# Altium PCB stlink072.PcbDoc
Units mm, origin at the board's own origin, x right, y up, seen from the top; angles counter-clockwise.
Board outline 48 x 18 mm, 2 copper layers (Top Layer, Bottom Layer); 29 components, 29 nets, 121 pads, 35 vias.
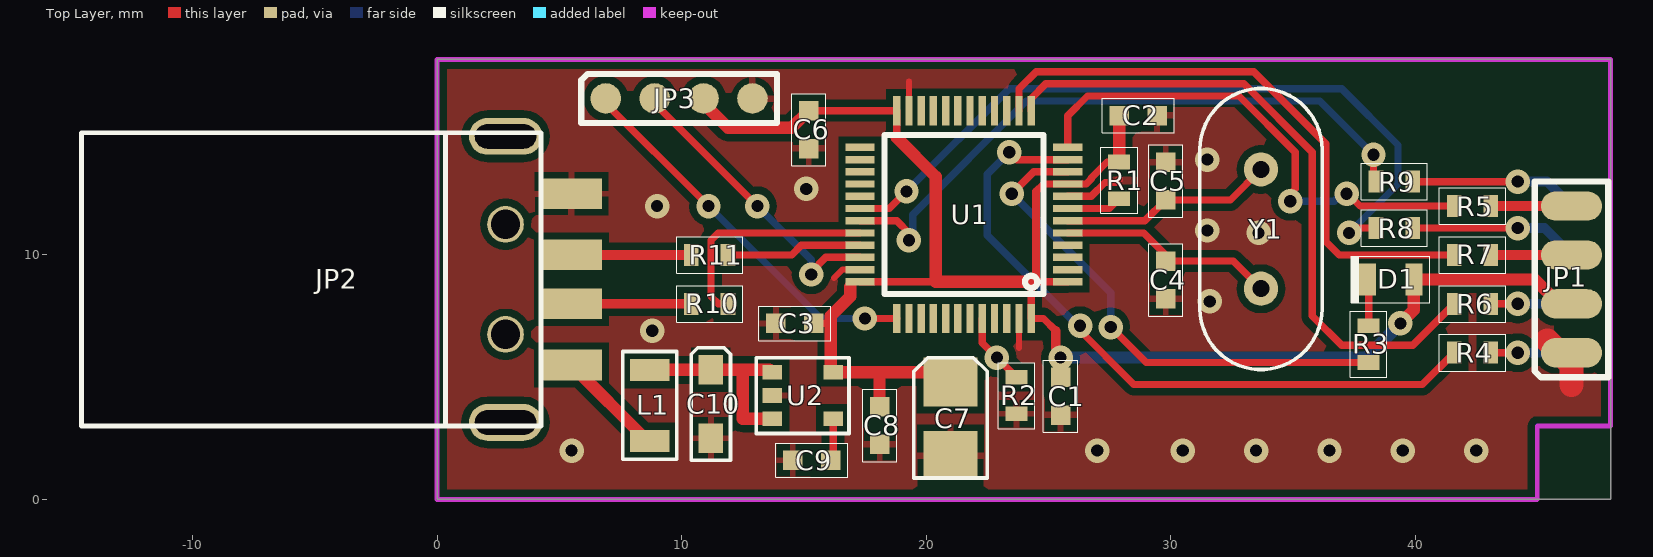
[diagram p0: Top Layer view]
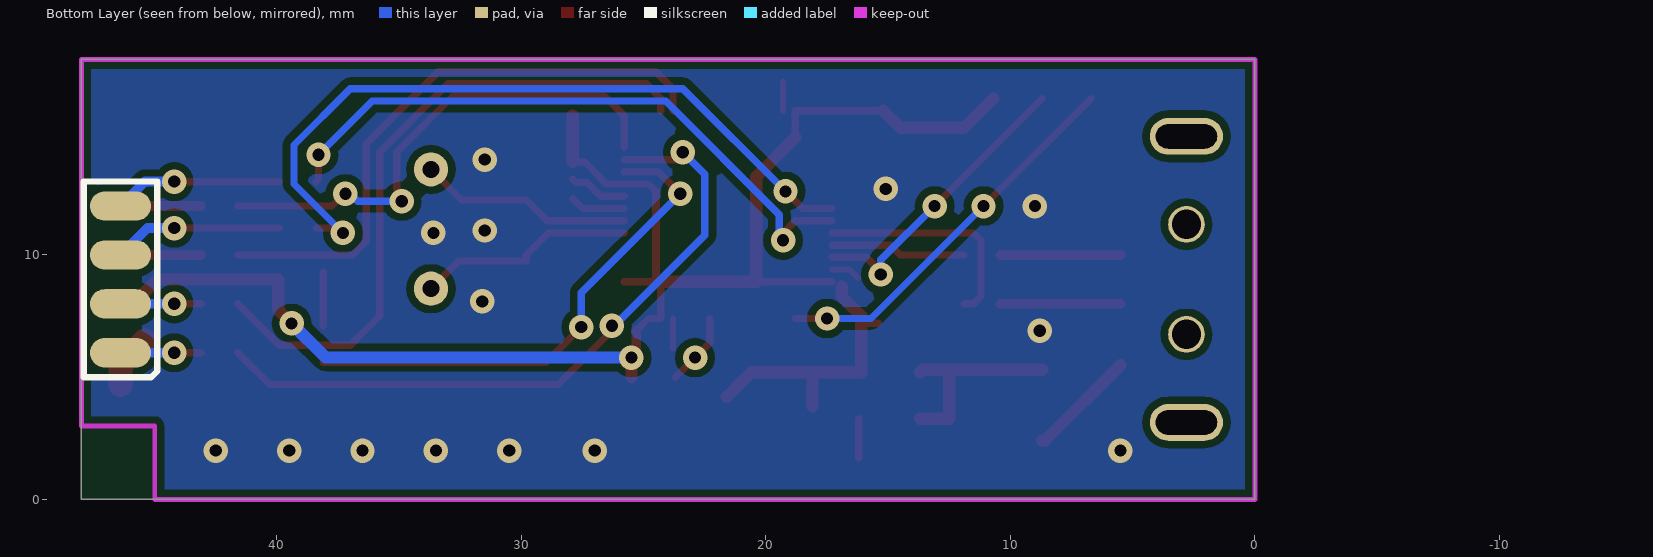
[diagram p1: Bottom Layer view, seen from below]

## Layer stack, top to bottom
Top Solder: solder mask 0.0102, Solder Resist, Dk 3.5
Top Layer: signal copper 0.0356
Dielectric 1: dielectric 0.32, FR-4, Dk 4.8
Bottom Layer: signal copper 0.0356
Bottom Solder: solder mask 0.0102, Solder Resist, Dk 3.5

## Board outline
0,0 48,0 48,18 0,18

## Design rules (kind name [scope] priority, off if disabled: settings)
Clearance Clearance_2 [InNamedPolygon('GND_B') Or  InNamedPolygon('GND_T')] p1: gap=0.3 ignorepadtopadclearanceinfootprint=FALSE except(0: Arc-Hole Track-Hole SMDPad-Hole THPad-Hole Via-Hole Fill-Hole Poly-Hole Region-Hole Text-Hole)
Clearance Clearance_1 [InNamedPolygon('GND_T') vs InComponent('JP1')] p2: gap=0.5 ignorepadtopadclearanceinfootprint=FALSE except(0: Arc-Hole Track-Hole SMDPad-Hole THPad-Hole Via-Hole Fill-Hole Poly-Hole Region-Hole Text-Hole)
Clearance [All] p3: gap=0.2 ignorepadtopadclearanceinfootprint=FALSE except(0: Arc-Hole Track-Hole SMDPad-Hole THPad-Hole Via-Hole Fill-Hole Poly-Hole Region-Hole Text-Hole)
ComponentClearance [InComponent('JP3') vs InComponent('JP1')] p1: gap=-2 collisioncheckmode=3 verticalgap=-2 showdistances=FALSE
HoleSize [All] p1: absolutevalues=TRUE maxlimit=3 minlimit=0.025 maxpercent=80.000 minpercent=20.000
MinimumSolderMaskSliver [All] p1: minsoldermaskwidth=0
PolygonConnect PolygonConnect_1 [IsVia vs IsNamedPolygon('GND_T') Or  IsNamedPolygon('GND_B')] p1: connectstyle=Direct reliefconductorwidth=0.254 reliefentries=4 polygonreliefangle="90 Angle" airgapwidth=0.254
PolygonConnect [All] p2: connectstyle=Relief reliefconductorwidth=0.254 reliefentries=4 polygonreliefangle="90 Angle" airgapwidth=0.254
RoutingVias [All] p1: holewidth=0.5 width=1 viastyle="Through Hole" minholewidth=0.4 minwidth=0.9 maxholewidth=2.5 maxwidth=3
SilkToSilkClearance [All] p1: silktosilkclearance=0
SilkToSolderMaskClearance [IsPad] p1: minsilkscreentomaskgap=0 clearancetoexposedcopper=TRUE
SolderMaskExpansion SolderMaskExpansion_1 [All] p1: expansion=0.1
SolderMaskExpansion [IsVia] p2: expansion=-0.15
Width [All] p1: maxlimit=2 minlimit=0.2 preferedwidth=0.2
25 further rules are at their usual default settings.

## Components (designator, comment, footprint, x,y, rotation, side; value= is the part's Value field where it differs from the comment)
C1 "100nF" C-0603 25.5,5 r270 top
C2 "100nF" C-0603 27.9,15.7 r0 top
C3 "100nF" C-0603 15.4,7.2 r180 top
C4 "22pF" C-0603 29.8,8.2 r90 top
C5 "22pF" C-0603 29.8,13.8 r270 top
C6 "100nF" C-0603 15.2,15.9 r270 top
C7 "33uF 6V" TANTAL-B 21,1.8 r90 top
C8 "100nF" C-0603 18.1,3.8 r270 top
C9 "nc" C-0603 16.1,1.6 r180 top
C10 "10uF 6V" TANTAL-A 11.2,2.5 r90 top
D1 "LED" LED-0805 39,9 r0 top
JP1 "Header 4X2" HDR2x4smd 46.4,9 r90 top
JP2 "USB_conn" USB_A_M_SMD 5.5,9 r90 top locked
JP3 "Header 4" HDR1x4_SS 9.9,16.4 r0 top
L1 "SUPRESOR" R-1206 8.7,5.3 r270 top
R1 "10k" R-0603 27.9,13.8 r270 top
R2 "10k" R-0603 23.7,3.5 r90 top
R3 "1k" R-0603 38.1,5.6 r90 top
R4 "100R" R-0603 41.6,6 r0 top
R5 "100R" R-0603 41.6,12 r0 top
R6 "100R" R-0603 41.6,8 r0 top
R7 "100R" R-0603 41.6,10 r0 top
R8 "100R" R-0603 38.4,11.1 r0 top
R9 "100R" R-0603 38.4,13 r0 top
R10 "0" R-0603 11.9,8 r180 top
R11 "0" R-0603 11.9,10 r180 top
U1 "STM32F072C8T6" LQFP48 25.8,14.4 r180 top
U2 "LP2981-3.3" SOT-23-5 13.7,5.2 r90 top
Y1 "8 MHz" HC-49/U(T) 33.7,13.5 r270 top

## Footprints (in the part's own frame and the unit in brackets; to place one, negate y for a bottom-side part, rotate by r counter-clockwise, add the part's x,y. Pads: shape width x height; smd on the part's side, far side on the other; paste and mask are expansions set on the pad)
C-0603 [mm]
  rect 0.8x0.8 smd: 1(0,0) 2(1.55,0)
  silkscreen extent -0.7,-0.7 2.25,0.7
HC-49/U(T) [mm]
  round 1.4 hole 0.7: 1(0,0) 2(4.88,0)
  silkscreen extent -3.31,-2.5 8.19,2.5
HDR1x4_SS [mm]
  round 1.25 smd: 1(-3,0) 2(-1,0) 3(1,0) 4(3,0)
  silkscreen extent -4,-1 4,1
HDR2x4smd [mm]
  oval 1.2x2.5 smd: 1(-3,0) 2(-1,0) 3(1,0) 4(3,0)
  oval 1.2x2.5 smd far side: 5(-3,0) 6(-1,0) 7(1,0) 8(3,0)
  silkscreen extent -4,-1.5 4,1.5
LED-0805 [mm]
  rect 0.7x1.3 smd: A(0.95,0) K(-0.95,0)
  silkscreen extent -1.6,-0.95 1.6,0.95
LQFP48 [mm] "48 pins 0.5 pitch"
  rect 1.2x0.3 smd: 1(0,5.5) 2(0,5) 3(0,4.5) 4(0,4) 5(0,3.5) 6(0,3) 7(0,2.5) 8(0,2) 9(0,1.5) 10(0,1) 11(0,0.5) 12(0,0) 25(8.5,0) 26(8.5,0.5) 27(8.5,1) 28(8.5,1.5) 29(8.5,2) 30(8.5,2.5) 31(8.5,3) 32(8.5,3.5) 33(8.5,4) 34(8.5,4.5) 35(8.5,5) 36(8.5,5.5)
  rect 0.3x1.2 smd: 13(1.5,-1.5) 14(2,-1.5) 15(2.5,-1.5) 16(3,-1.5) 17(3.5,-1.5) 18(4,-1.5) 19(4.5,-1.5) 20(5,-1.5) 21(5.5,-1.5) 22(6,-1.5) 23(6.5,-1.5) 24(7,-1.5) 37(7,7) 38(6.5,7) 39(6,7) 40(5.5,7) 41(5,7) 42(4.5,7) 43(4,7) 44(3.5,7) 45(3,7) 46(2.5,7) 47(2,7) 48(1.5,7)
  silkscreen extent 1,-0.5 7.5,6
R-0603 [mm]
  rect 0.6x0.9 smd: 1(0,0) 2(1.5,0)
  silkscreen extent -0.6,-0.75 2.1,0.75
R-1206 [mm]
  rect 0.9x1.6 smd: 1(0,0) 2(2.9,0)
  silkscreen extent -0.75,-1.1 3.65,1.1
SOT-23-5 [mm]
  rect 0.6x0.8 smd: 1(0,0) 2(-0.95,0) 3(-1.9,0) 4(-1.9,-2.5) 5(0,-2.5)
  silkscreen extent -2.5,-3.15 0.6,0.65
TANTAL-A [mm]
  rect 1.2x1 smd: 1(0,0) 2(2.8,0)
  silkscreen extent -0.9,-0.8 3.7,0.8
TANTAL-B [mm]
  rect 2x2.2 smd: 1(0,0) 2(3,0)
  silkscreen extent -0.92,-1.5 4,1.5
USB_A_M_SMD [mm] "usb male smd mount"
  oval 1.5x3 hole 1 slot 2.5 at 90 deg: 0(-5.85,2.7) 0(5.85,2.7)
  round 1.5 hole 1.2 unplated mask+0: 0(-2.25,2.7) 0(2.25,2.7)
  rect 1.25x2.5 smd: 1(-3.5,0) 2(-1,0) 3(1,0) 4(3.5,0)
  silkscreen extent -6,1.25 6,20.05

## Part data
C1 C2 C3 C4 C5 C6 C8 C9: library part CAPN
C7 C10: library part CAPP
JP1: "Header, 4-Pin, Dual row"
JP2: "USB_connector"
JP3: "Header, 4-Pin"
R1 R2 R3 R4 R5 R6 R7 R8 R9 R10 R11: library part RES
Y1: library part Y

## Via types
v1: diameter 1, hole 0.5, Top Layer to Bottom Layer, 35 vias

## Nets (pads, with @x,y where several pads share a name; then routed paths per layer and width w, separated by ;. In a path a pad name is that pad's centre, name@x,y a point inside that pad or via, vN(x,y) a via of type N, cw(c..) or ccw(c..) an arc to the next point about the centre after c; other vN are vias at no path point)
BOOT0: R2.2 U1.44 | length 3
  Top Layer w0.3: U1.44 22.3,6.4 R2.2
  other v1: 22.9,5.8
DM: JP2.2 R10.2 | length 4.9
  Top Layer w0.4: JP2.2 R10.2
DP: JP2.3 R11.2 | length 4.9
  Top Layer w0.4: JP2.3 R11.2
GND: C1.2 C2.2 C3.2 C4.1 C5.1 C6.2 C7.1 C8.2 C9.2 C10.1 JP1.1 JP2.4 JP3.4 R2.1 U1.8 U1.23 U1.35 U1.47 U2.2 | length 8.2
  Top Layer w0.25: 16.238,9.058 16.58,9.4 U1.35 ; U1.23 19.3,17.1 ; 23.8,6.2 U1.47
  Top Layer w0.3: U1.8 26.755,12.4 27.321,12.965 27.765,12.965 27.9,13.1
  Top Layer w1: 45.4,6.5 46.4,5.5 46.4,4.7
  other v1: 5.5,2 27,2 30.5,2 33.5,2 36.5,2 39.5,2 42.5,2 8.8,6.9 31.6,8.1 33.6,10.9 31.5,11 9,12 15.1,12.7 31.5,13.9
NetC4_2: C4.2 U1.5 Y1.2 | length 9
  Top Layer w0.3: U1.5 28.9,10.9 29.8,10 C4.2 32.57,9.75 Y1.2
NetC5_2: C5.2 U1.6 Y1.1 | length 8.8
  Top Layer w0.3: U1.6 28.95,11.4 C5.2 32.45,12.25 Y1.1
NetC9_1: C9.1 U2.4 | length 1.6
  Top Layer w0.3: C9.1@16.2,1.7 U2.4
NetC10_2: C10.2 L1.1 U2.1 U2.3 | length 8.2
  Top Layer w0.5: L1.1 12.5,5.3 ; U2.3 12.5,3.3 12.5,5.3 ; U2.1 13.6,5.3 12.5,5.3
NetD1_K: D1.K R3.2 | length 2.2
  Top Layer w0.3: R3.2 D1.K@38.1,9.3
NetJP2_1: JP2.1 L1.2 | length 4.5
  Top Layer w0.5: JP2.1 8.6,2.4 L1.2
NetR1_2: R1.2 U1.7 | length 2.3
  Top Layer w0.3: U1.7 27.5,11.9 R1.2
NetR3_1: R3.1 U1.10 | length 21
  Top Layer w0.3: v1(23.5,12.5) 24.4,13.4 U1.10 ; v1(27.55,7.05) 29,5.6 R3.1
  Bottom Layer w0.3: v1(23.5,12.5) 27.55,8.45 v1(27.55,7.05)
NetR4_1: R4.1 U1.11 | length 28.6
  Top Layer w0.3: v1(23.4,14.2) 23.7,13.9 U1.11 ; v1@26.15,7.05 28.5,4.7 40.3,4.7 R4.1
  Bottom Layer w0.3: v1(23.4,14.2) 22.5,13.3 22.5,10.8 26.2,7.1 v1(26.3,7.1)
NetR5_1: R5.1 U1.12 | length 21.1
  Top Layer w0.3: U1.12 25.8,15.7 26.6,16.5 32.8,16.5 35.1,14.2 35.1,12.7 34.9,12.5 v1(34.9,12.2) ; v1@37.525,12.675 37.525,12.225 37.75,12 R5.1
  Bottom Layer w0.3: v1(34.9,12.2) 36.7,12.2 37.1,12.6 v1(37.2,12.5)
NetR6_1: R6.1 U1.13 | length 27.1
  Top Layer w0.3: U1.13 24.3,16.4 24.9,17 33.007,17 35.8,14.207 35.8,7.5 37,6.3 39.9,6.3 R6.1
NetR7_1: R7.1 U1.14 | length 24.4
  Top Layer w0.3: U1.14 23.8,16.8 24.5,17.5 33.4,17.5 36.35,14.55 36.35,10.55 36.9,10 R7.1
NetR8_1: R8.1 U1.30 | length 30.6
  Top Layer w0.3: U1.30 18.5,11.9 v1(19.2,12.6) ; v1(37.3,10.9) 37.5,11.1 R8.1
  Bottom Layer w0.3: v1(19.2,12.6) 23.4,16.8 37,16.8 39.3,14.5 39.3,12.9 v1(37.3,10.9)
NetR9_1: R9.1 U1.31 | length 26.2
  Top Layer w0.3: U1.31 18.8,11.4 19.3,10.9 v1(19.3,10.6) ; v1(38.3,14.1) 38.3,13.1 R9.1
  Bottom Layer w0.3: v1@19.35,10.85 19.45,10.95 19.45,11.648 24.102,16.3 36.1,16.3 v1(38.3,14.1)
NetR10_1: R10.1 U1.32 | length 9.3
  Top Layer w0.3: R10.1 11.5,8 11.2,8.3 11.2,10.6 11.5,10.9 U1.32
NetR11_1: R11.1 U1.33 | length 5.6
  Top Layer w0.3: R11.1 14.5,10 14.9,10.4 U1.33
RXD: JP1.8 R9.2 | length 6.8
  Top Layer w0.3: R9.2 v1@44.1,13
  Bottom Layer w0.4: v1(44.2,13) 45.4,13 JP1.8
SWCLK: JP3.1 U1.37 | length 15.8
  Top Layer w0.3: JP3.1@6.7,16.4 v1(11.1,12) ; v1(17.5,7.4) U1.37
  Bottom Layer w0.3: v1(11.1,12) 15.7,7.4 v1(17.5,7.4)
SWDIO: JP3.2 U1.34 | length 12.3
  Top Layer w0.3: JP3.2@8.7,16.4 v1(13.1,12) ; v1(15.3,9.2) 15.3,9.3 15.9,9.9 U1.34
  Bottom Layer w0.3: v1(13.1,12) 15.3,9.8 v1(15.3,9.2)
T_RST: JP1.5 R4.2 | length 3.3
  Top Layer w0.3: R4.2 v1(44.2,6)
  Bottom Layer w0.4: v1(44.2,6) JP1.5
T_SWCLK: JP1.4 R5.2 | length 3.3
  Top Layer w0.4: R5.2 JP1.4
T_SWDIO: JP1.3 R7.2 | length 3.3
  Top Layer w0.4: R7.2 JP1.3
T_SWO: JP1.6 R6.2 | length 3.3
  Top Layer w0.3: R6.2 v1(44.2,8)
  Bottom Layer w0.4: v1(44.2,8) JP1.6
TXD: JP1.7 R8.2 | length 7
  Top Layer w0.3: R8.2 v1(44.2,11.1)
  Bottom Layer w0.4: v1(44.2,11.1) 45.3,11.1 JP1.7
VCC: C1.1 C2.1 C3.1 C6.1 C7.2 C8.1 D1.A JP1.2 JP3.3 R1.1 U1.1 U1.9 U1.24 U1.36 U1.48 U2.5 | length 74.5
  Top Layer w0.2: 16.002,7.2 16.102,7.1 ; U2.5@16.102,5.298 U2.5 ; 24.3,8.8 24.4,8.9
  Top Layer w0.3: C6.1 U1.24 18.8,14.8 ; C3.1 16.002,7.2 ; U1.36 20.4,8.9 ; 24.3,8.8 U1.48 24.8,7.4 25.3,6.9 ; 24.4,8.9 U1.1 ; 24.5,12.6 24.8,12.9 U1.9 26.545,12.9 26.75,13.105 26.75,13.15 27.4,13.8 R1.1
  Top Layer w0.32: 24.5,8.934 24.5,12.6
  Top Layer w0.4: 25.3,6.9 25.3,6.2 v1@25.5,6
  Top Layer w0.5: JP3.3@10.7,16.4 11.9,15.2 14.5,15.2 C6.1 ; U2.5@16.102,5.2 16.102,5.298 16.102,7.1 16.102,7.502 16.9,8.3 16.9,8.7 ; U2.5 18.1,5.2 ; C8.1 18.1,5.2 ; 18.8,14.8 20.4,13.2 20.4,8.9 24.3,8.9 ; C7.2@21.6,4.2 C7.2 20.6,5.2 18.1,5.2 ; C1.1 v1(25.5,5.8) v1@25.5,6 ; R1.1 C2.1 ; v1(39.4,7.2) 39.95,7.75 D1.A 44.9,9 45.9,8 JP1.2
  Bottom Layer w0.5: v1(25.5,5.8) 38,5.8 v1(39.4,7.2)
pads on no net: JP2.0 U1.2 U1.3 U1.4 U1.15 U1.16 U1.17 U1.18 U1.19 U1.20 U1.21 U1.22 U1.25 U1.26 U1.27 U1.28 U1.29 U1.38 U1.39 U1.40 U1.41 U1.42 U1.43 U1.45 U1.46

## Polygon pours and split planes (outlines as drawn)
GND on Bottom Layer "GND_B" (solid, remove dead copper, pour order 0): 0,0 48,0 48,18 0,18
GND on Top Layer "GND_T" (solid, remove dead copper, pour order 2): 0,0 48,0 48,18 0,18

## Keep-outs
Keep-Out Layer:
  lines w0.2: 0,0 0,18 48,18 48,3 45,3 45,0 0,0

## Dimensions
0,0 to 48,0 on Mechanical 1
0,0 to 0,18 on Mechanical 1